# Altium PCB InverterPCB.PcbDoc
Units mil, origin at the board's own origin, x right, y up, seen from the top; angles counter-clockwise.
Board outline 3937.01 x 3937.01 mil, 2 copper layers (Top Layer, Bottom Layer); 70 components, 45 nets, 213 pads, 15 vias.
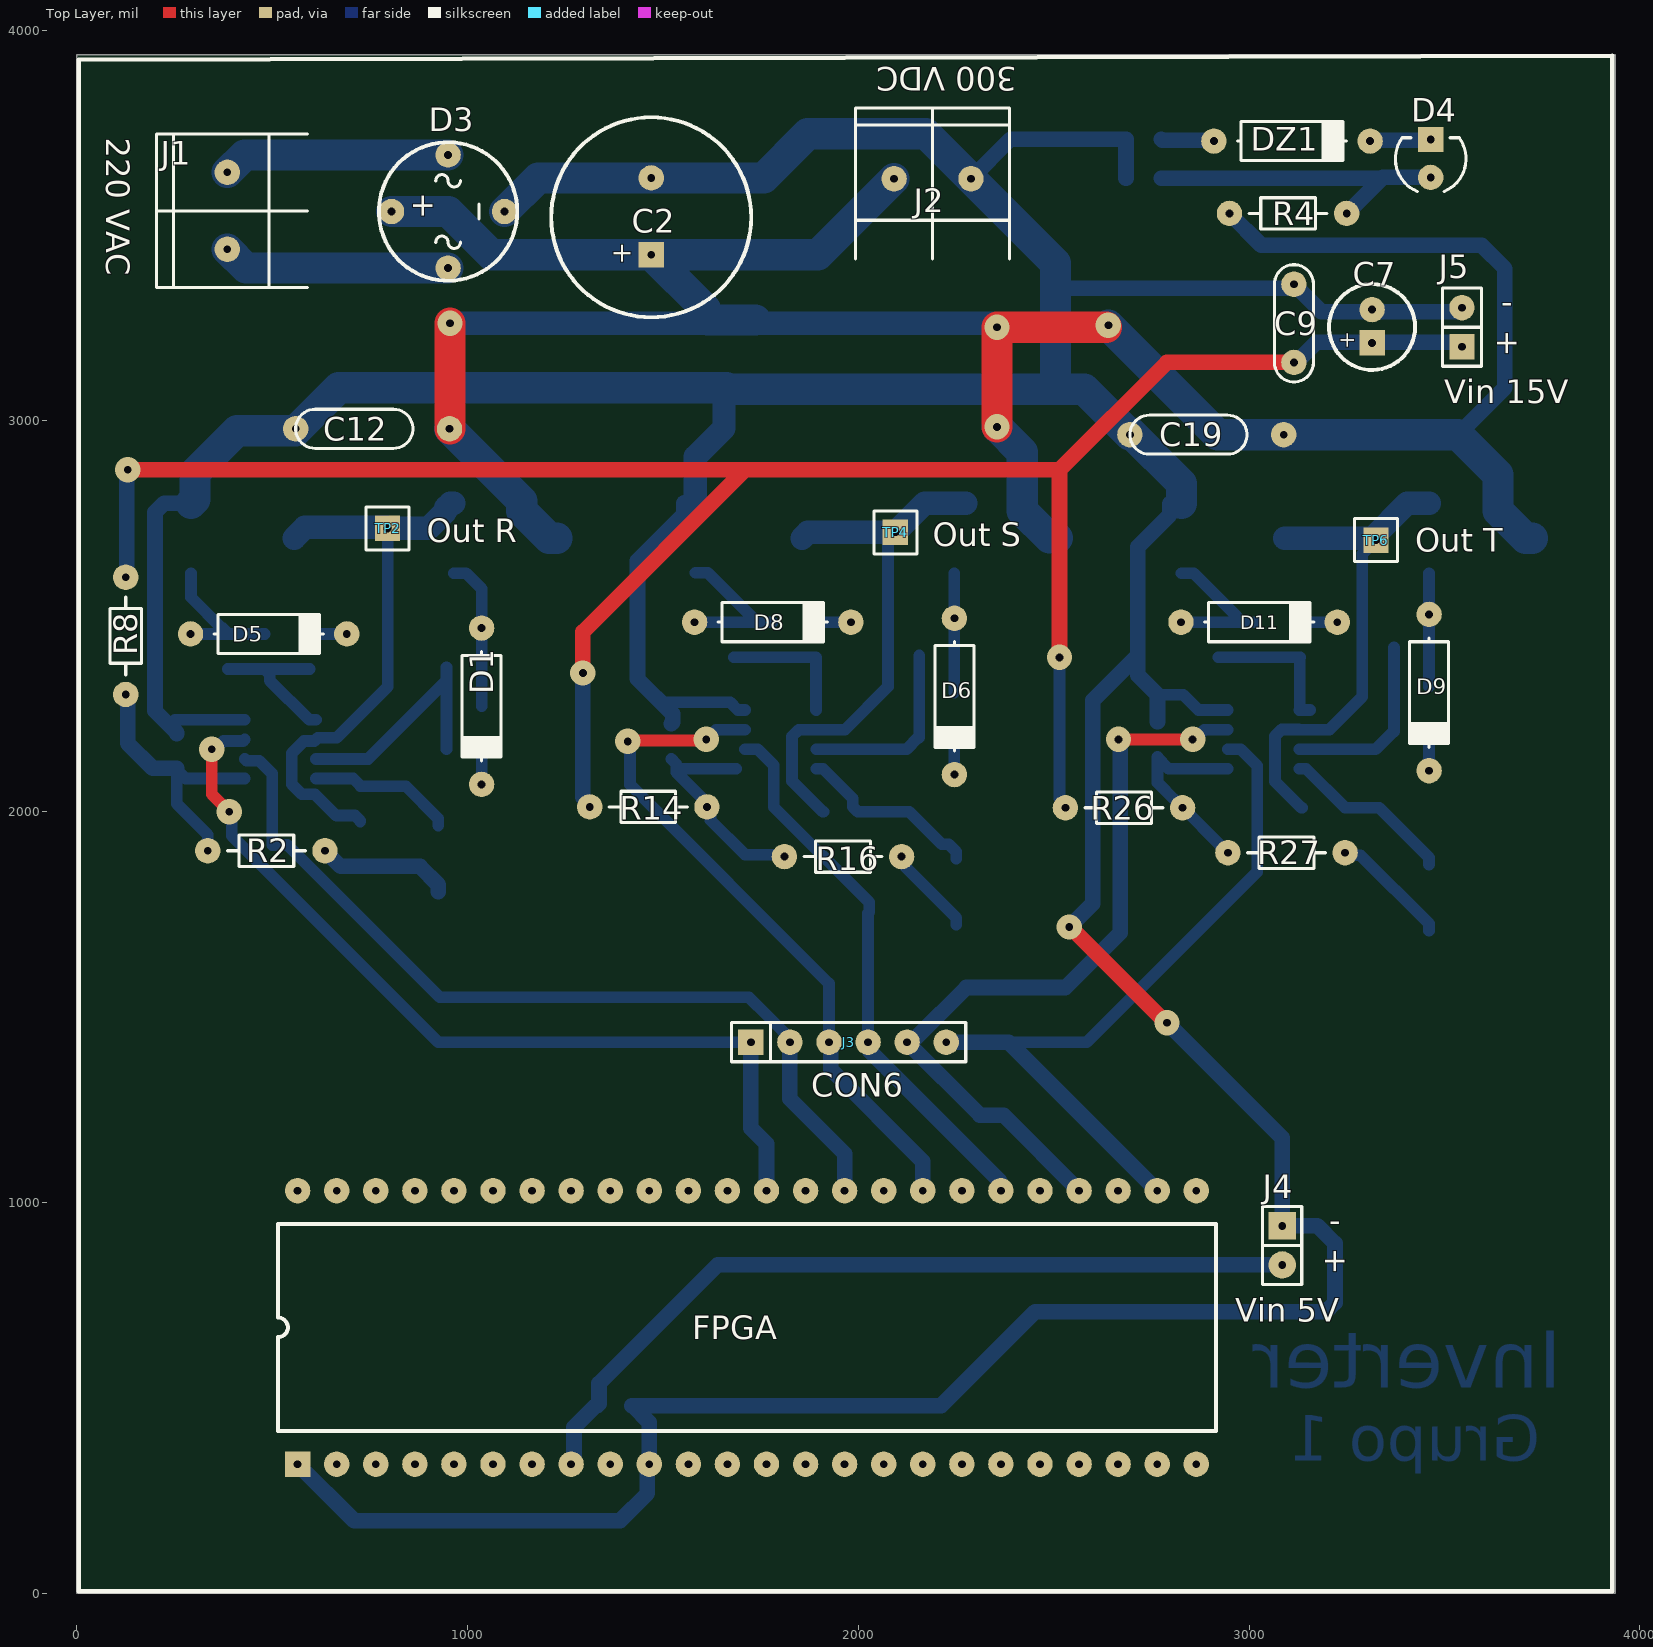
[diagram p0: Top Layer view]
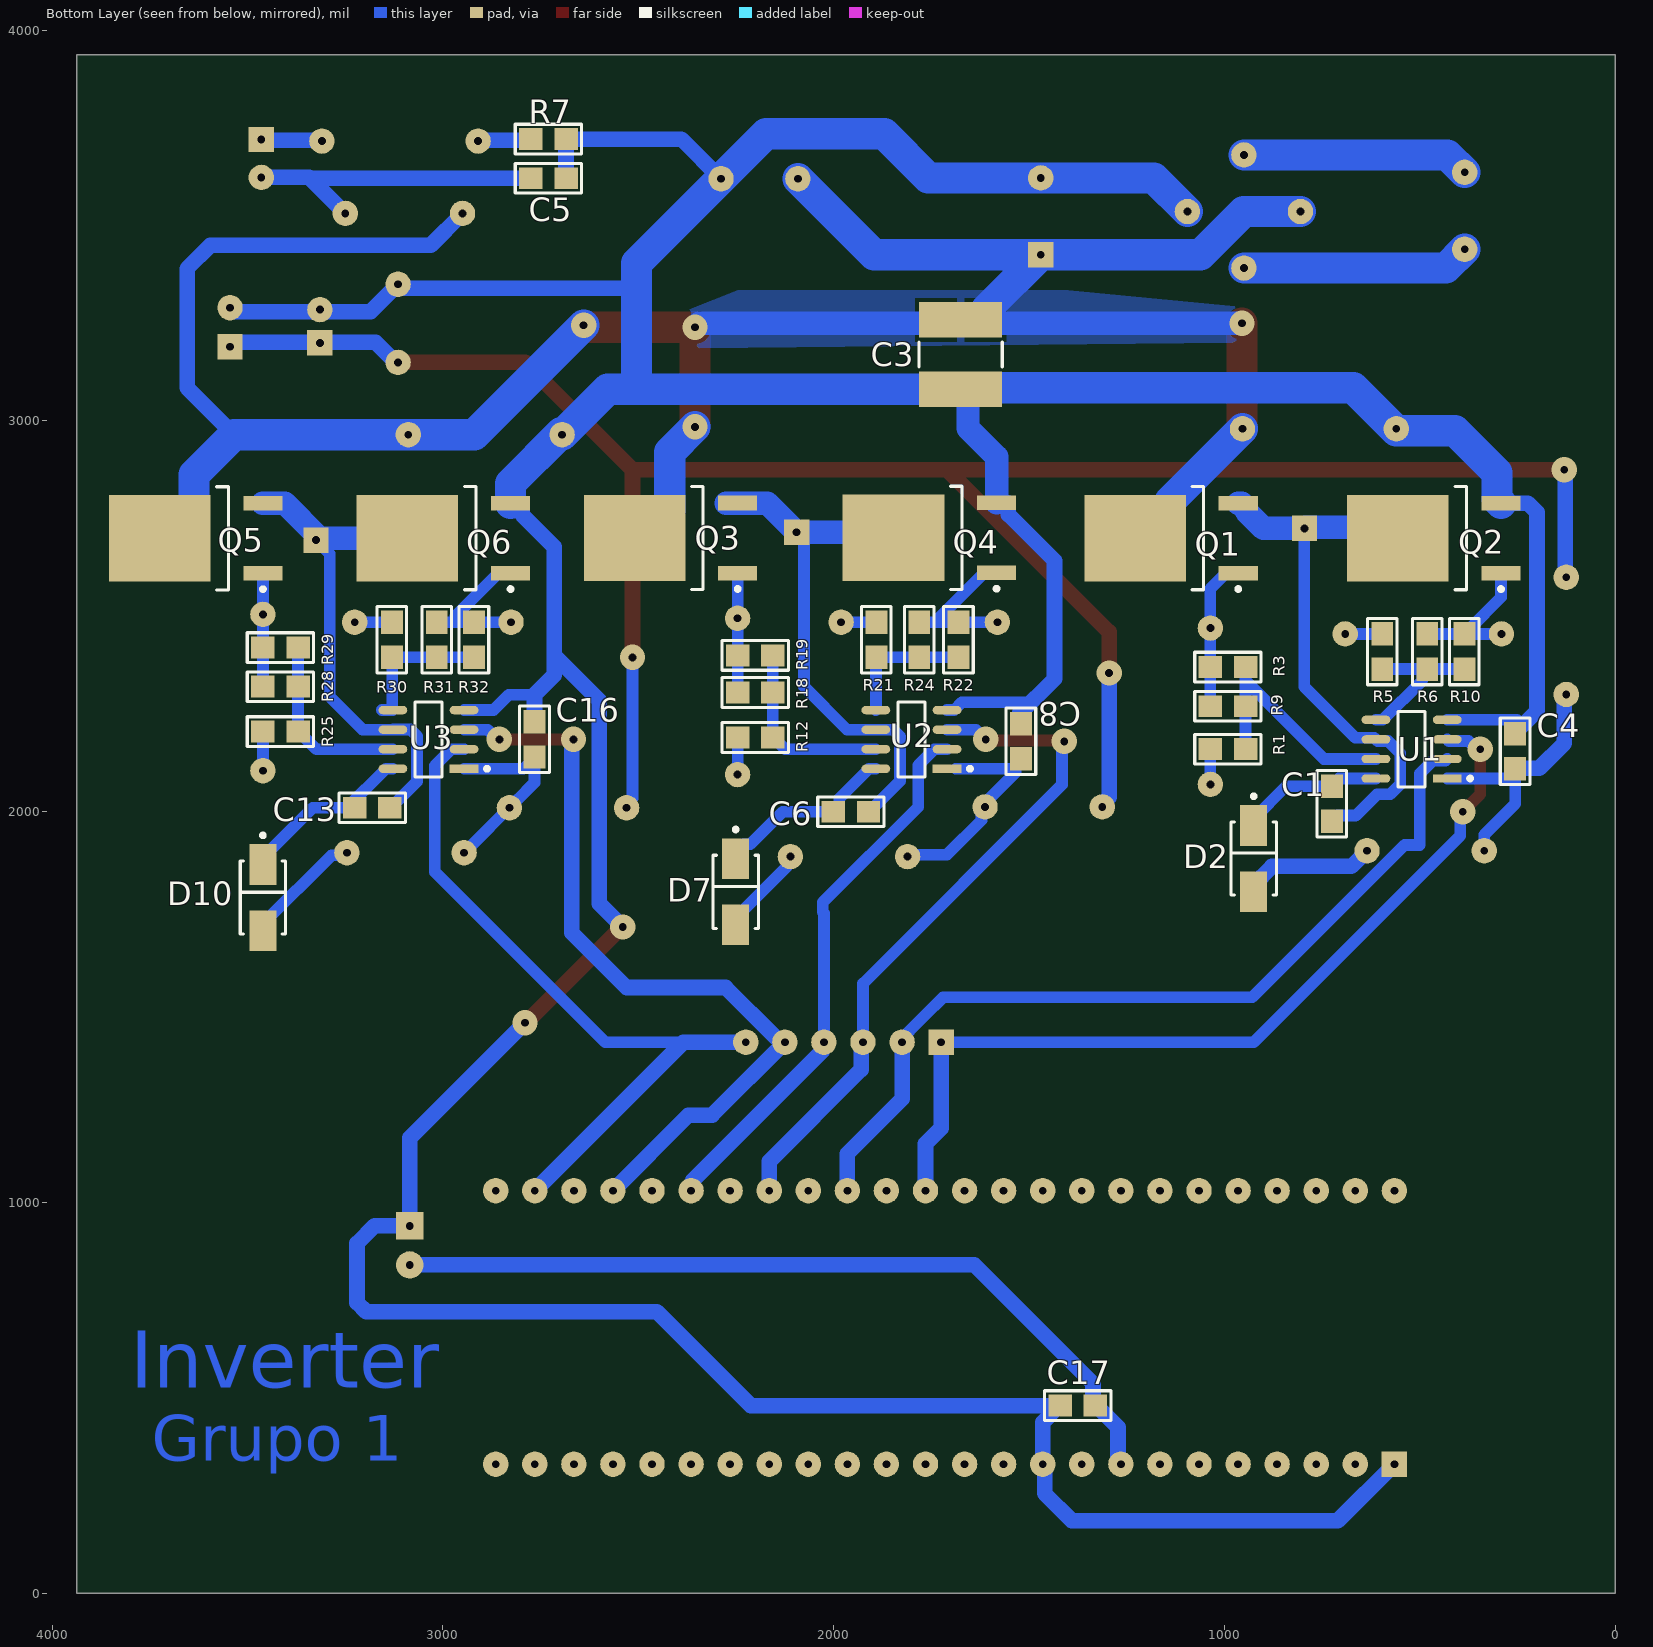
[diagram p1: Bottom Layer view, seen from below]

## Layer stack, top to bottom
Top Solder: solder mask 0.4, Solder Resist, Dk 3.5
Top Layer: signal copper 1.4
Dielectric 1: dielectric 12.6, FR-4, Dk 4.8
Bottom Layer: signal copper 1.4
Bottom Solder: solder mask 0.4, Solder Resist, Dk 3.5

## Board outline
0,0 3937.01,0 3937.01,3937.01 0,3937.01

## Design rules (kind name [scope] priority, off if disabled: settings)
Clearance [All] p1: gap=10 ignorepadtopadclearanceinfootprint=FALSE except(0: Arc-Hole Track-Hole SMDPad-Hole THPad-Hole Via-Hole Fill-Hole Poly-Hole Region-Hole Text-Hole; 15: Arc-Fill Arc-Poly Arc-Region Track-Fill Track-Poly Track-Region SMDPad-Fill SMDPad-Poly SMDPad-Region THPad-Fill THPad-Poly THPad-Region Via-Fill Via-Poly Via-Region)
PlaneClearance [All] p1: clearance=40
PolygonConnect [All] p1: connectstyle=Relief reliefconductorwidth=20 reliefentries=4 polygonreliefangle="90 Angle" airgapwidth=10
RoutingVias [All] p1: holewidth=20 width=65 viastyle="Through Hole" minholewidth=10 minwidth=50 maxholewidth=25 maxwidth=100
SilkToSilkClearance [All] p1: silktosilkclearance=0
SilkToSolderMaskClearance [IsPad] p1: minsilkscreentomaskgap=0 clearancetoexposedcopper=TRUE
SolderMaskExpansion [All] p1: expansion=4 istentingtop=FALSE
Width [All] p1: maxlimit=80 minlimit=30 preferedwidth=40 minimp=50.000000 maximp=50.000000 favimp=50.000000
27 further rules are at their usual default settings.

## Components (designator, comment, footprint, x,y, rotation, side; value= is the part's Value field where it differs from the comment)
C1 "1u" 0805 725,2020 r270 bottom
C2 "10u - 400V" CAP200RP2 1470,3521.4 r90 top
C3 "1uF - 500V" FP-GRM55D-0_4-IPC_B 1675,3170 r270 bottom
C4 "10u" 0805 255.91,2155 r90 bottom
C5 "100n" 0805 2730,3621.4 r0 bottom
C6 "1u" 0805 1955.91,2000 r180 bottom
C7 "10u - 25V" CAP100RP 3315,3240.63 r90 top
C8 "10u" 0805 1520.91,2180 r90 bottom
C9 "100n" CAP200#1 3115,3250 r90 top
C12 "100n - 400V" CAP200#2 710,2980 r180 top
C13 "1u" 0805 3180.91,2010 r180 bottom
C16 "10u" 0805 2765.91,2185 r90 bottom
C17 "470n" 0805 1375,480 r0 bottom
C19 "100n - 400V" CAP200#2 2845,2965 r180 top
D1 "1N4148" DO41 1035.91,2270 r270 top
D2 "ES1G" FP-403AE-MFG 925,1880 r270 bottom value=10pF
D3 "PUENTE" "PUENTE - W10M" 805.24,3536.16 r90 top
D4 "LED" LED3 3465,3671.4 r90 top
D5 "1N4148" DO41 490.91,2455 r0 top
D6 "1N4148" DO41 2245.91,2295 r270 top
D7 "ES1G" FP-403AE-MFG 2250.91,1795 r270 bottom value=10pF
D8 "1N4148" DO41 1780.91,2485 r0 top
D9 "1N4148" DO41 3460.91,2305 r270 top
D10 "ES1G" FP-403AE-MFG 3460.91,1780 r270 bottom value=10pF
D11 "1N4148" DO41 3025.91,2485 r0 top
DZ1 "13V" DO41 3110,3716.4 r0 top
FPGA "upduino" FPGA 565,330 r90 top
J1 "VAC" BORNERA2 385,3537.97 r0 top
J2 "AUX  310dc" BORNERA2 2190,3620 r270 top
J3 "CON6" SIP6 1725,1410 r0 top
J4 "Vin 5V" SIP2#1 3085,890 r270 top
J5 "Vin 15V" SIP2#2 3545,3240 r90 top
Q1 "IPD50R650CE" INF-PG-TO252-3-313_N 1135.91,2700 r0 bottom
Q2 "IPD50R650CE" INF-PG-TO252-3-313_N 463.39,2700 r0 bottom
Q3 "IPD50R650CE" INF-PG-TO252-3-313_N 2417.17,2700.24 r0 bottom
Q4 "IPD50R650CE" INF-PG-TO252-3-313_N 1754.43,2701.04 r0 bottom
Q5 "IPD50R650CE" INF-PG-TO252-3-313_N 3632.14,2699.76 r0 bottom
Q6 "IPD50R650CE" INF-PG-TO252-3-313_N 2998.36,2700 r0 bottom
R1 "33" 0805 990.91,2160 r0 bottom
R2 "2.2" RES300 335,1900 r0 top
R3 "68" 0805 990.91,2370 r0 bottom
R4 "100K - 2W" RES300 3250,3531.4 r180 top
R5 "33" 0805 595.91,2410 r90 bottom
R6 "68" 0805 480.91,2410 r90 bottom
R7 "1K" 0805 2730,3721.4 r180 bottom
R8 "10" RES300 125,2300 r90 top
R9 "68" 0805 990.91,2270 r0 bottom
R10 "68" 0805 385.91,2410 r90 bottom
R12 "33" 0805 2200.91,2190 r0 bottom
R14 "10" RES300 1612.61,2012.39 r180 top
R16 "2.2" RES300 1810.91,1885 r0 top
R18 "68" 0805 2200.91,2305 r0 bottom
R19 "68" 0805 2200.91,2400 r0 bottom
R21 "33" 0805 1890.91,2440 r90 bottom
R22 "68" 0805 1680.91,2440 r90 bottom
R24 "68" 0805 1780.91,2440 r90 bottom
R25 "33" 0805 3415.91,2205 r0 bottom
R26 "10" RES300 2830,2010 r180 top
R27 "2.2" RES300 2945.91,1895 r0 top
R28 "68" 0805 3415.91,2320 r0 bottom
R29 "68" 0805 3415.91,2420 r0 bottom
R30 "33" 0805 3130.91,2440 r90 bottom
R31 "68" 0805 3015.91,2440 r90 bottom
R32 "68" 0805 2920.91,2440 r90 bottom
TP2 "Out R" TPTH 795,2725 r90 top
TP4 "Out S" TPTH 2095,2715 r0 top
TP6 "Out T" TPTH 3325,2695 r90 top
U1 "UCC27710" FP-PG-DSO-8-IPC_C 520.91,2160 r0 bottom
U2 "UCC27710" FP-PG-DSO-8-IPC_C 1800.91,2185 r0 bottom
U3 "UCC27710" FP-PG-DSO-8-IPC_C 3037.09,2185 r0 bottom

## Footprints (in the part's own frame and the unit in brackets; to place one, negate y for a bottom-side part, rotate by r counter-clockwise, add the part's x,y. Pads: shape width x height; smd on the part's side, far side on the other; paste and mask are expansions set on the pad)
0805 [mil] "Pasivo 0805"
  rect 60x56 smd: 1(-45,0) 2(45,0)
  silkscreen extent -85,-38 85,38, body extent -40,-25 39,25, height 15
BORNERA2 [mil] "Bornera con Tornillos 5mm separación"
  round 65 hole 20: 1(0,98.43) 2(0,-98.43)
  silkscreen extent -181,-197 205,197, body extent -148,-193 155,221, height 394
CAP100RP [mil] "Body diameter 5mm"
  rect 65x65 hole 20: 1(-40.63,0)
  round 65 hole 20: 2(44.37,0)
  silkscreen extent -110,-110 110,110, body extent -99,-99 99,100, height 454
CAP200#1 [mil]
  round 65 hole 20: 1(-100,0) 2(100,0)
  silkscreen extent -150,-50 150,50, body extent -110,-46 110,44, height 246
CAP200#2 [mil]
  round 65 hole 20: 1(-243.7,0) 2(150,0)
  silkscreen extent -150,-50 150,50, body extent -110,-46 110,44, height 246
CAP200RP2 [mil] "Body Diameter 12.5mm"
  rect 65x65 hole 20: 1(-96.06,0)
  round 65 hole 20: 2(100.79,0)
  silkscreen extent -256,-256 256,256, body extent -246,-245 244,246, height 787
DO41 [mil]
  round 65 hole 20: 1(-200,0) 2(200,0)
  silkscreen extent -140,-50 140,50, body extent -215,-47 215,54, height 80
FP-403AE-MFG [mm]
  rect 2.65x1.75 smd paste+0 mask+0: 1(-2.15,0) 2(2.15,0)
  silkscreen extent -4.17,-1.48 2.37,1.48, body extent -2.6,-1.36 2.6,1.36, height 2.5
FP-GRM55D-0_4-IPC_B [mil]
  rect 90.64x212.72 smd paste+0 mask+0: 1(-88.6,0) 2(88.6,0)
  silkscreen extent -31,-106 31,106, body extent -112,-98 112,98, height 79
FP-PG-DSO-8-IPC_C [mil]
  rect 73.78x21.34 smd paste+0 mask+0: 1(-91.18,75)
  rrect100% 73.78x21.34 smd paste+0 mask+0: 2(-91.18,25) 3(-91.18,-25) 4(-91.18,-75) 5(91.18,-75) 6(91.18,-25) 7(91.18,25) 8(91.18,75)
  silkscreen extent -155,-96 35,96, body extent -118,-96 118,96, height 69
FPGA [mil]
  rect 65x65 hole 20: 1(0,0)
  round 65 hole 20: 2(0,-100) 3(0,-200) 4(0,-300) 5(0,-400) 6(0,-500) 7(0,-600) 8(0,-700) 9(0,-800) 10(0,-900) 11(0,-1000) 12(0,-1100) 13(0,-1200) 14(0,-1300) 15(0,-1400) 16(0,-1500) 17(0,-1600) 18(0,-1700) 19(0,-1800) 20(0,-1900) 21(0,-2000) 22(0,-2100) 23(0,-2200) 24(0,-2300) 25(700,-2300) 26(700,-2200) 27(700,-2100) 28(700,-2000) 29(700,-1900) 30(700,-1800) 31(700,-1700) 32(700,-1600) 33(700,-1500) 34(700,-1400) 35(700,-1300) 36(700,-1200) 37(700,-1100) 38(700,-1000) 39(700,-900) 40(700,-800) 41(700,-700) 42(700,-600) 43(700,-500) 44(700,-400) 45(700,-300) 46(700,-200) 47(700,-100) 48(700,0)
  silkscreen extent 85,-2350 615,50
INF-PG-TO252-3-313_N [mm] "DPAK, 3-Leads, Body 6.5x6.12mm, Pitch 2.28mm, IPC Medium Density"
  rect 2.55x0.95 smd: 1(-4.35,2.28) 3(-4.35,-2.28)
  rect 6.6x5.6 smd: 2(2.35,0)
  silkscreen extent -4.47,-3.35 -1.35,3.43, body extent -2.1,-3.32 4.12,3.32, height 2.35
LED3 [mil]
  round 65 hole 20: 1(-48,0)
  rect 65x65 hole 20: 2(49,0)
  silkscreen extent -84,-90 54,90, body extent -65,-64 65,65, height 19
"PUENTE - W10M" [mil]
  round 65 hole 20: 1(0,0) 2(-144.76,-144.76) 3(0,-289.52) 4(144.76,-144.76)
  silkscreen extent -177,-322 177,32
RES300 [mil]
  round 65 hole 20: 1(0,0) 2(300,0)
  silkscreen extent 50,-40 250,40, body extent -10,-38 310,38, height 79
SIP2#1 [mil]
  rect 70x70 hole 20: 1(-50,0)
  round 70 hole 20: 2(50,0)
  silkscreen extent -100,-50 100,50
SIP2#2 [mil]
  rect 65x65 hole 20: 1(-50,0)
  round 65 hole 20: 2(50,0)
  silkscreen extent -100,-50 100,50
SIP6 [mil]
  rect 65x65 hole 20: 1(0,0)
  round 65 hole 20: 2(100,0) 3(200,0) 4(300,0) 5(400,0) 6(500,0)
  silkscreen extent -50,-50 550,50, body extent -50,-51 550,49, height 330
TPTH [mil]
  rect 65x65 hole 20: 1(0,0)
  silkscreen extent -55,-55 55,55, body extent -50,-50 50,50, height 238

## Part data
C1 C4 C5 C6 C8 C9 C12 C13 C16 C17 C19: library part CAP
C2 C7: library part CAPPOL
C3: library part CMP-2000-06370-2, "Chip Multilayer Ceramic Capacitors for General Purpose, 2220, 1.0uF, X7R, 15%, 10%, 500V", Capacitance=1uF, Case Code (Imperial)=2220, Case Code (Metric)=5750, Dielectric=X7R, Max Operating Temperature=125°C, Min Operating Temperature=-55°C, Package Quantity=1, Tolerance=10%, Voltage=250V, Case/Package=2220, Depth=5mm, Height=2mm, Lead Free="Lead Free", Length=5.7mm, Material=Ceramic, Mount="Surface Mount", Number of Pins=2, Packaging="Tape and Reel", REACH SVHC="No SVHC", Termination=SMD/SMT, Thickness=0.087inch, Voltage Rating=250V, Voltage Rating (DC)=250V, Width=5mm
D1 D5 D6 D8 D9 D11: library part DIODO
D2 D7 D10: library part CMP-07163-000025-1, "DIODE GEN PURP 400V 1A SMA", Capacitance=10pF, Forward Current=1A, Manufacturer="ON Semiconductor", Max Junction Temp=+150°C, Max Repetitive Reverse Voltage=400V, Max Surge Forward Current=30A, Package=403AE, Peak Reverse Current=5uA, Temperature="to +150°C", Automotive=No, Category=Diode, ComponentLink2Description=Datasheet, ComponentLink2URL=https://www.onsemi.com/pub/Collateral/ES1J-D.PDF, Device Class L1="Discrete Semiconductors", Device Class L2=Diodes, Device Class L3="Rectifier Diodes", Digikey Description="DIODE GEN PURP 400V 1A SMA", Footprint Url=https://www.onsemi.com/pub/Collateral/403AE.PDF, Height=2.5mm, Lead Free=Yes, Manufacturer Part Number=ES1G, Mouser Description="Rectifiers 1.0 A Ultra Fast Recovery Rect", Octopart=https://octopart.com/es1g-on+semiconductor-84324858, RoHS=TRUE, Standoff Height=0.05mm, Temperature Range High=+150°C
DZ1: library part "DIODO ZENER"
FPGA: library part FPGA, "upduino v3.0"
J1 J2: library part "BORNERA 2"
J4 J5: library part CON2, "UPDuino Power Input"
Q1 Q2 Q3 Q4 Q5 Q6: library part CMP-1164-00335-1, "N-Channel CoolMOS CE Power-Transistor, 500 V VDS, 6.1 A ID, -55 to 150 degC, PG-TO252-3-313, Reel, Green", Manufacturer=Infineon, ComponentLink1Description="Manufacturer URL", ComponentLink1URL=http://www.infineon.com/, ComponentLink2Description=Datasheet, ComponentLink2URL=http://www.infineon.com/dgdl/IPD50R650CE+2.0.pdf?folderId=db3a3043156fd5730115c736bcc70ff2&fileId=db3a304339d29c450139d41341a202a1, ComponentLink3Description="Package Specification", ComponentLink3URL=http://www.infineon.com/dgdl/PG-TO252-3-313-Package_Overview.pdf?folderId=db3a30432b57a660012b81890ade72d2&fileId=db3a30432b57a660012b8193af2872eb, DatasheetVersion="Rev. 2.0", Green=TRUE, ID (max)="6.1Â A", IDpuls (max)="19Â A", Mounting Technology="Surface Mount", PackageDescription="3-Pin Plastic (Green) Transistor Single Outline Package, 6.5 x 6.12 mm Body, 2.28 mm Pitch", PackageReference=PG-TO252-3-313, PackageVersion=Oct-10, Packing=Reel, PartNumber=IPD50R650CE, Polarity=N, Ptot (max)="47Â W", QG="15Â nC", RDS (on) (max)="650Â mOhm", Rth="2.67Â K/W", RthJA (max)="62Â K/W", RthJC (max)="2.67Â K/W", Technology="CoolMOS CE", VDS (max)="500Â V", VGS(th) (max)="3.5Â V", VGS(th) (min)="2.5Â V"
R1 R12 R25: library part RES, "33?"
R2 R3 R4 R5 R6 R7 R8 R9 R10 R14 R16 R18 R19 R21 R22 R24 R26 R27 R28 R29 R30 R31 R32: library part RES
TP2 TP4 TP6: library part TP
U1 U2 U3: library part CMP-32851-000209-1, "GATE DRVR HI/LOW SIDE 8SOIC", Case/Package=SOIC, Max Operating Temperature=150°C, Max Output Current=600mA, Max Supply Voltage=20V, Min Operating Temperature=-40°C, Min Supply Voltage=10V, Output Voltage=620V, Package Quantity=95, Channel Type=Independent, Fall Time=90ns, Halogen Free="Halogen Free", Height=0.059inch, Lead Free="Lead Free", Length=0.196inch, Mount="Surface Mount", Number of Channels=2, Number of Drivers=2, Number of Outputs=2, Number of Pins=8, Output Current=600mA, Packaging=Rail/Tube, Propagation Delay=160ns, Reach SVHC Compliant=Yes, RoHS Compliant=Yes, Series=-, Width=0.157inch

## Via types
v1: diameter 65, hole 20, Top Layer to Bottom Layer, 15 vias

## Nets (pads, with @x,y where several pads share a name; then routed paths per layer and width w, separated by ;. In a path a pad name is that pad's centre, name@x,y a point inside that pad or via, vN(x,y) a via of type N, cw(c..) or ccw(c..) an arc to the next point about the centre after c; other vN are vias at no path point)
5V: C17.1 FPGA.8 J4.2 | length 2110.7
  Bottom Layer w40: FPGA.8 1272.41,337.41 1272.41,424.41 1328,480 C17.1 ; C17.1@1332,480 1336.43,484.43 1336.43,536.43 1640,840 J4.2
GND: C2.2 C3.2 C4.2 C5.1 C7.2 C8.2 C9.2 C12.2 C16.2 C17.2 C19.2 D3.3 FPGA.1 FPGA.10 J2.1 J4.1 J5.2 Q2.3 Q4.3 Q6.3 R7.2 U1.4 U2.4 U3.4 | length 14552.6
  Top Layer w40: v1(2540,1705) 2542.5,1705 2787.5,1460 v1(2790,1460)
  Bottom Layer w30: 250.91,2235 U1.4 ; 1497.04,2280 1672.16,2280 1692.16,2260 U2.4 ; 2765.91,2299.09 2831.81,2299.09 2870.91,2260 U3.4
  Bottom Layer w40: C4.2 255.91,2202 200,2257.91 200,2766.33 223.43,2789.76 Q2.3 ; FPGA.1 710,185 1390,185 1460.22,255.22 1460.22,325.22 FPGA.10 1465,437 C17.2@1422,480 ; C17.2 C17.2@1422,480 ; C8.2 1525,2229.09 1525,2250 1435,2340 1435,2642.64 1552.97,2760.61 1552.97,2789.5 1554.27,2790.8 Q4.3 ; J2.1 2389.82,3721.4 R7.2 ; 2505,3340 C9.2@3115,3340 ; v1(2540,1705) 2600,1765 2600,2284.93 2715,2399.93 ; C5.1 R7.2@2685,3716.4 ; C16.2 2765.91,2299.09 2715,2350 2715,2399.93 ; v1(2790,1460) 3085,1165 J4.1 3175,940 3220,895 3220,743.43 3196.57,720 2452.5,720 2212.5,480 C17.2@1422,480 ; Q6.3 2798.2,2789.76 2796.9,2788.46 2796.9,2759.57 2715,2677.66 2715,2399.93 ; C9.2 3185,3280 3315,3280 3529.84,3280 3539.84,3290 J5.2
  Bottom Layer w60: Q4.3 1583.17,2908.17 1656.23,2981.23 1656.23,3066.08 1668.97,3078.83 1671.55,3081.4 C3.2
  Bottom Layer w80: Q2.3 302.32,2799.96 302.32,2867.32 410,2975 560,2975 670,3085 1662.8,3085 1668.97,3078.83 C3.2@1669.68,3078.12 ; D3.3 1180.79,3622.19 1757.72,3622.19 1870.53,3735 2173.43,3735 J2.1 2505,3403.43 2505,3340 2505,3081.4 ; C3.2 2505,3081.4 ; C19.2 2578.6,3081.4 2505,3081.4 ; C19.2@2697.34,2970 2827.1,2840.24 Q6.3
HI-1: FPGA.34 J3.2 U1.2 | length 2246.4
  Bottom Layer w30: U1.2 434.05,2130.67 466.97,2130.67 500,2097.64 500,1915 538.68,1915 928.68,1525 1720,1525 1769.15,1475.85 1807.5,1437.5 1807.5,1436.97 1825,1419.47 J3.2
  Bottom Layer w40: J3.2 1825,1265 1965,1125 FPGA.34
HI-2: FPGA.30 J3.4 U2.2 | length 1423.2
  Bottom Layer w30: U2.2 1742.64,2160 1783.94,2118.7 1783.94,2011.97 2028.03,1767.88 2028.03,1743.03 2025,1740 J3.4
  Bottom Layer w40: J3.4 2029.78,1405.22 2029.78,1386.97 2360.22,1056.54 2360.22,1034.78 FPGA.30
HI-3: FPGA.26 J3.6 U3.2 | length 1878.3
  Bottom Layer w30: 2385,1410 2585,1410 3020.91,1845.91 3020.91,2117.92 2978.82,2160 U3.2
  Bottom Layer w40: J3.6 2385,1410 FPGA.26
LI-1: FPGA.36 J3.1 U1.3 | length 2281.9
  Top Layer w30: v1(345,2160) 345,2045 v1(390,2000)
  Bottom Layer w30: v1(345,2160) 354.47,2160 375.14,2180.67 425.39,2180.67 U1.3 ; v1(390,2000) 396.7,1993.3 396.7,1938.3 925,1410 J3.1
  Bottom Layer w40: J3.1 1725,1190 1765,1150 FPGA.36
LI-2: FPGA.32 J3.3 U2.3 | length 1774.9
  Top Layer w30: v1(1410,2180) 1412.5,2182.5 1608.41,2182.5 v1(1610.91,2185)
  Bottom Layer w30: v1(1410,2180) 1415.91,2174.09 1415.91,2069.09 1925,1560 J3.3 ; v1(1610.91,2185) 1635.91,2210 U2.3
  Bottom Layer w40: J3.3 1929.78,1405.22 1929.78,1340.22 2165,1105 FPGA.32
LI-3: FPGA.28 J3.5 U3.3 | length 2016.7
  Top Layer w30: v1(2665.91,2185) v1(2855.64,2185)
  Bottom Layer w30: v1(2855.64,2185) 2860.38,2185 2885.38,2210 U3.3
  Bottom Layer w40: J3.5 2311.54,1223.46 2371.54,1223.46 FPGA.28 ; J3.5@2149.11,1422.5 2276.61,1550 2530,1550 2670.69,1690.69 2670.69,2180.22 v1(2665.91,2185)
NetC1_1: C1.1 D2.1 U1.8 | length 374.3
  Bottom Layer w30: U1.8 707,2085 725,2067 C1.1 842.36,2065 925,1982.36 D2.1
NetC1_2: C1.2 Q1.3 Q2.2 TP2.1 U1.6 | length 1464.9
  Bottom Layer w30: C1.2 725,1977 712,1990 664.21,1990 609.21,2045 575.42,2045 550.2,2070.22 550.2,2149.78 581.09,2180.67 607.76,2180.67 U1.6 616.42,2189.33 665.23,2189.33 795.91,2320 TP2.1@795.91,2725
  Bottom Layer w60: Q2.2 583.41,2727.5 TP2.1@792.5,2727.5 ; TP2.1@795.91,2725 899.88,2725 944.45,2769.57 944.45,2778.46 955.75,2789.76 Q1.3
NetC4_1: C4.1 R2.1 R8.1 U1.1 | length 704
  Bottom Layer w30: R2.1 335,1940.91 255.91,2020 255.91,2108 278.91,2085 U1.1
  Bottom Layer w40: R8.1 129.78,2295.22 129.78,2175.22 194.03,2110.97 254.93,2110.97 C4.1
NetC5_2: C5.2 D4.1 R4.1 | length 818.1
  Bottom Layer w40: C5.2 3340,3621.4 ; R4.1 3340,3621.4 ; D4.1 3342,3623.4 3340,3621.4
NetC6_1: C6.1 D7.1 U2.8 | length 476.8
  Bottom Layer w30: U2.8 1909.65,2110 1985.91,2033.75 1985.91,2013 1998.91,2000 C6.1 2130.55,2000 2213.74,1916.81 2231.46,1916.81 2250.91,1897.36 D7.1
NetC6_2: C6.2 Q3.3 Q4.2 TP4.1 U2.6 | length 1377
  Bottom Layer w30: C6.2 1908.91,2000 1830.2,2078.71 1830.2,2192.43 1847.77,2210 U2.6 1965.91,2210 2075.91,2320 TP4.1@2075.91,2715
  Bottom Layer w60: Q4.2@1855.91,2700 1870.91,2715 2075.91,2715 TP4.1 2170,2790 Q3.3 Q3.3@2275,2790
NetC7_1: C7.1 C9.1 J5.1 R8.2 R14.2 R26.2 | length 5749
  Top Layer w40: v1(130,2875) 1710,2875 ; v1(1295,2355) 1295,2460 1710,2875 ; 2505,2875 2515,2865 v1(2515,2395) ; C9.1 2790,3150 2515,2875 1710,2875
  Bottom Layer w30: v1(2515,2395) 2515,2034.47 2530,2019.47 R26.2
  Bottom Layer w40: R8.2 127.5,2602.5 127.5,2872.5 v1(130,2875) ; v1(1295,2355) 1295,2036.77 1312.61,2019.16 R14.2 ; C9.1 3120.95,3150 3172.21,3201.26 3315,3201.26 3533.74,3201.26 J5.1
NetC8_1: C8.1 R14.1 R16.1 U2.1 | length 568.4
  Bottom Layer w30: C8.1 1533.91,2122 1533.91,2101.09 1590,2045 1590,2044.47 1615,2019.47 1615,2010 1621.7,2003.3 1621.7,1978.3 1710.2,1889.8 1806.1,1889.8 R16.1 ; C8.1@1545.83,2110.08 1545.91,2110 1641.97,2110 1642.05,2110.08 U2.1@1687.83,2110.08
NetC13_1: C13.1 D10.1 U3.8 | length 444.6
  Bottom Layer w30: U3.8 3145.84,2110 3245.84,2010 3333.27,2010 3460.91,1882.36 D10.1
NetC13_2: C13.2 Q5.3 Q6.2 TP6.1 U3.6 | length 1321.3
  Bottom Layer w30: Q6.2 Q6.2@3110.56,2700 ; C13.2 3133.91,2010 3066.38,2077.52 3066.38,2192.96 3083.95,2210.54 3127.74,2210.54 U3.6 3205.91,2210 3290,2294.09 3290,2660 TP6.1
  Bottom Layer w60: Q6.2@3090.95,2700.07 3315.07,2700.07 3405,2790 3460.41,2790 Q5.3
NetC16_1: C16.1 R26.1 R27.1 U3.1 | length 511.7
  Bottom Layer w30: C16.1@2765.91,2138 2793.91,2110 U3.1 ; C16.1 2765.91,2074.09 2810,2030 2810.91,2030 R27.1
NetD1_1: D1.1 Q1.1 R3.2 R9.2 | length 388.2
  Bottom Layer w30: Q1.1 996.14,2610.24 1035.91,2570.47 D1.1 R3.2 R9.2
NetD1_2: D1.2 R1.2 | length 90
  Bottom Layer w30: D1.2 R1.2
NetD2_2: D2.2 R2.2 | length 343.7
  Bottom Layer w40: R2.2 675,1860 878.07,1860 925,1813.07 D2.2
NetD3_2: D3.2 J1.2 | length 584.9
  Bottom Layer w80: J1.2 433.15,3391.4 D3.2
NetD3_4: D3.4 J1.1 | length 584.8
  Bottom Layer w60: J1.1 J1.1@386.35,3636.4
  Bottom Layer w80: J1.1 429.52,3680.92 D3.4
NetD4_2: D4.2 DZ1.2 | length 156.7
  Bottom Layer w40: DZ1.2 3312,3718.4 3463,3718.4 D4.2
NetD5_1: D5.1 Q2.1 R6.2 R10.2 | length 385.3
  Bottom Layer w30: D5.1 R10.2 ; Q2.1 292.13,2548.78 370.91,2470 372.91,2470 385.91,2457 R10.2 ; R6.2 R10.2
NetD5_2: D5.2 R5.2 | length 95
  Bottom Layer w30: R5.2 D5.2
NetD6_1: D6.1 Q3.1 R18.2 R19.2 | length 305.5
  Bottom Layer w30: R18.2 R19.2 D6.1 Q3.1
NetD6_2: D6.2 R12.2 | length 95
  Bottom Layer w30: D6.2 R12.2
NetD7_2: D7.2 R16.2 | length 232.6
  Bottom Layer w30: R16.2 2117.6,1878.3 2117.6,1861.37 2250.91,1728.07 D7.2
NetD8_1: D8.1 Q4.1 R22.2 R24.2 | length 405.9
  Bottom Layer w30: D8.1 R22.2 1730.91,2485 ; Q4.1 1614.66,2611.28 1730.91,2495.03 1730.91,2485 ; R24.2 1730.91,2485
NetD8_2: D8.2 R21.2 | length 90
  Bottom Layer w30: R21.2 D8.2
NetD9_1: D9.1 Q5.1 R28.2 R29.2 | length 290
  Bottom Layer w30: R28.2 R29.2 D9.1 Q5.1
NetD9_2: D9.2 R25.2 | length 100
  Bottom Layer w30: D9.2 R25.2
NetD10_2: D10.2 R27.2 | length 308.1
  Bottom Layer w30: R27.2 3252.03,1888.88 3285.1,1888.88 3460.91,1713.07 D10.2
NetD11_1: D11.1 Q6.1 R31.2 R32.2 | length 392.2
  Bottom Layer w30: D11.1 R32.2 2968.41,2485 ; Q6.1 2858.6,2610.24 2968.41,2500.43 2968.41,2485 ; R31.2 2968.41,2485
NetD11_2: D11.2 R30.2 | length 95
  Bottom Layer w30: R30.2 D11.2
NetDZ1_1: DZ1.1 R7.1 | length 143.8
  Bottom Layer w40: R7.1 2777.5,3718.9 2907.5,3718.9 DZ1.1 DZ1.1@2905.22,3711.62
NetR1_1: R1.1 R3.1 R9.1 U1.7 | length 626.7
  Bottom Layer w30: U1.7 745.91,2135 945.91,2335 ; R1.1 R9.1 945.91,2335 ; R3.1 945.91,2335
NetR5_1: R5.1 R6.1 R10.1 U1.5 | length 404.6
  Bottom Layer w30: R10.1 R6.1 ; R5.1 R6.1 ; U1.5 594.53,2235 493.91,2335.62 493.91,2352 R6.1
NetR12_1: R12.1 R18.1 R19.1 U2.7 | length 486.2
  Bottom Layer w30: U2.7 2123.91,2160 2153.91,2190 R12.1 R18.1 R19.1
NetR21_1: R21.1 R22.1 R24.1 U2.5 | length 345.5
  Bottom Layer w30: R22.1 R24.1 R21.1 1891.5,2394.41 1891.5,2260.59 U2.5
NetR25_1: R25.1 R28.1 R29.1 U3.7 | length 476.3
  Bottom Layer w30: U3.7 3323.91,2160 3368.91,2205 R25.1 R28.1 R29.1
NetR30_1: R30.1 R31.1 R32.1 U3.5 | length 373.7
  Bottom Layer w30: R32.1 R31.1 R30.1 3129.59,2393.68 3129.59,2261.32 U3.5 U3.5@3155.91,2260
V300: C2.1 C3.1 C12.1 C19.1 D3.1 J2.2 Q1.2 Q3.2 Q5.2 R4.2 | length 7217
  Top Layer w80: C12.1@955,2980 v1(955,3250) ; v1(2355,2985) v1(2355,3240) v1@2635,3240
  Bottom Layer w40: R4.2 3031.4,3450 3595,3450 3655,3390 3655,3085 3535,2965
  Bottom Layer w60: v1(955,3250) C3.1@1613.96,3250 ; C3.1@1736.04,3250 2343.65,3250 2353.65,3240 v1(2355,3240)
  Bottom Layer w80: D3.1 950.24,3536.16 1061.06,3425.34 C2.1 ; C12.1 1138.5,2795.2 1138.5,2770.24 1208.74,2700 Q1.2 ; C3.1@1736.04,3258.6 C3.1 1613.96,3258.6 1608.64,3263.92 1608.64,3286.7 C2.1 ; J2.2 1896.91,3425.34 C2.1 ; v1(2355,2985) 2419.76,2920.24 2419.76,2770.47 2490,2700.24 Q3.2 ; v1(2640,3245) 2920,2965 C19.1 3535,2965 3637.52,2862.48 3637.52,2770 3707.75,2699.76 Q5.2
pads on no net: FPGA.2 FPGA.3 FPGA.4 FPGA.5 FPGA.6 FPGA.7 FPGA.9 FPGA.11 FPGA.12 FPGA.13 FPGA.14 FPGA.15 FPGA.16 FPGA.17 FPGA.18 FPGA.19 FPGA.20 FPGA.21 FPGA.22 FPGA.23 FPGA.24 FPGA.25 FPGA.27 FPGA.29 FPGA.31 FPGA.33 FPGA.35 FPGA.37 FPGA.38 FPGA.39 FPGA.40 FPGA.41 FPGA.42 FPGA.43 FPGA.44 FPGA.45 FPGA.46 FPGA.47 FPGA.48

## Polygon pours and split planes (outlines as drawn)
V300 on Bottom Layer "V300_L02_P000" (solid, pour order 0): 915,3229.25 980,3200 2343.75,3186.25 2390,3232.5 2390,3276.94 2245,3335 1400,3335 915,3288.45

## Other copper
Bottom Layer:
  text "Inverter" at 3800,477.55 h250
  text "Grupo 1" at 3745,300.54 h200

## Silkscreen, mask and mechanical layers (free items; w line width, h text height)
Top Overlay:
  lines w11.81: 5,5 3930,5 3930,3934.71 5,3924.74 5,5
  text "300 VDC" at 2405,3905 h60 r180
  text "220 VAC" at 75,3725 h60 r270
  text "-" at 3675,3319.99 h60 r180
  text "+" at 3685,3165 h60 r90
  text "-" at 3235,969.99 h60 r180
  text "+" at 3245,815 h60 r90

## Text inside footprints (layer, text, board x,y; h text height)
C2: Top Overlay "+" at 1418,3399.4 h50 r90
C7: Top Overlay "+" at 3269,3183.63 h40 r90
D3: Top Overlay "+" at 910.63,3516.48 h60 r90